# EAGLE board Siemens-Rel (EAGLE 3.55)

No outline drawn. Coordinates in mm, seen from the top.
Copper layers used: 

## Footprints (pad centres in the part's own frame; a part is rotated, then mirrored left to right if it is on the bottom)
0140 = drill 1.422 pad 2.54 round:  -8.89,3.81;  -8.89,-3.81;  -1.27,3.81;  8.89,3.81;  8.89,-3.81
0300 = drill 1.422 pad 2.54 round:  -8.89,3.81;  -1.27,3.81;  8.89,3.81;  8.89,-3.81
1140 = drill 1.422 pad 2.54 round:  10,3.75;  11.75,-3.75;  8.25,-3.75 | drill 1.016 pad 2.184 round:  -12.5,3.75;  -12.5,-3.75
3140 = drill 1.016 pad 2.184 round:  -12.5,3.75;  -12.5,-3.75;  2.5,3.75;  7.5,3.75;  12.5,3.75;  2.5,-3.75;  7.5,-3.75;  12.5,-3.75
4240 = drill 1.016 pad 2.184 round:  -12.5,3.75;  -12.5,-3.75;  2.5,3.75;  7.5,3.75;  12.5,3.75;  2.5,-3.75;  7.5,-3.75;  12.5,-3.75
3026A = drill 0.813 pad 1.676 round:  5.08,2.54;  5.08,-2.54;  0,-2.54;  0,2.54;  -5.08,-2.54;  -5.08,2.54
3040A = drill 0.813 pad 1.676 round:  8.89,3.81;  8.89,-3.81;  3.81,-3.81;  3.81,3.81;  -8.89,-3.81;  -8.89,3.81
3042A = drill 1.016 pad 2.184 round:  -8.89,3.81;  -1.27,3.81;  -8.89,-3.81;  -1.27,-3.81;  3.81,-3.81;  3.81,3.81;  8.89,3.81;  8.89,-3.81
3042B = drill 1.016 pad 2.184 round:  -8.89,3.81;  -1.27,3.81;  -8.89,-3.81;  -1.27,-3.81;  3.81,-3.81;  3.81,3.81;  8.89,3.81;  8.89,-3.81;  -6.35,3.81;  -6.35,-3.81
3057A = drill 1.422 pad 2.54 round:  -7.5,11.25;  -7.5,6.25;  0,8.75 | drill 1.016 pad 2.184 round:  -7.5,-3.75;  -7.5,-11.25
3057B = drill 1.422 pad 2.54 round:  3.75,10;  -3.75,12.5;  -3.75,7.5 | drill 1.016 pad 2.184 round:  3.75,-12.5;  -3.75,-12.5
3061B = drill 1.422 pad 2.54 round:  11.43,3.81;  11.43,-3.81;  -13.9,-3.79;  -7.54,-3.79;  -10.67,3.79
3079A = drill 1.016 pad 1.778 round:  2.54,2.54;  2.54,-2.54;  0,-2.54;  0,2.54;  -5.08,-2.54;  -5.08,2.54;  5.08,2.54;  5.08,-2.54
3104A = drill 0.813 pad 1.778 round:  -3.81,6.35;  -8.89,6.35;  -3.81,-6.35;  -8.89,-6.35;  -1.27,-6.35;  -1.27,6.35;  8.89,-6.35;  1.27,6.35;  8.89,6.35;  3.81,6.35;  3.81,-6.35;  6.35,6.35;  6.35,-6.35;  1.27,-6.35

## Placement (x,y rotation side)
PE0140  [0140]  69.85,199.39 0 top
RE0300  [0300]  69.85,218.44 0 top
RT1140  [1140]  27.94,238.76 0 top
RT3140  [3140]  27.94,218.44 0 top
RT4240  [4240]  27.94,198.12 0 top
TQFP1  [-35SC]  0,0 0 top
V23026A  [3026A]  66.04,114.3 0 top
V23040A  [3040A]  69.85,180.34 0 top
V23042A  [3042A]  69.85,163.83 0 top
V23042B  [3042B]  69.85,146.05 0 top
V23057A  [3057A]  25.4,135.89 0 top
V23057B  [3057B]  27.94,163.83 270 top
V23061B  [3061B]  29.21,180.34 0 top
V23079A  [3079A]  66.04,128.27 0 top
V23104A  [3104A]  69.85,237.49 0 top

## Library data of the parts
PE0140 RE0300 RT1140 RT3140 RT4240 V23026A V23040A V23042A V23042B V23057A V23057B V23061B V23079A V23104A = siemens-
TQFP1 = BLATT